# EAGLE board 00A-050-A (EAGLE 6.3)
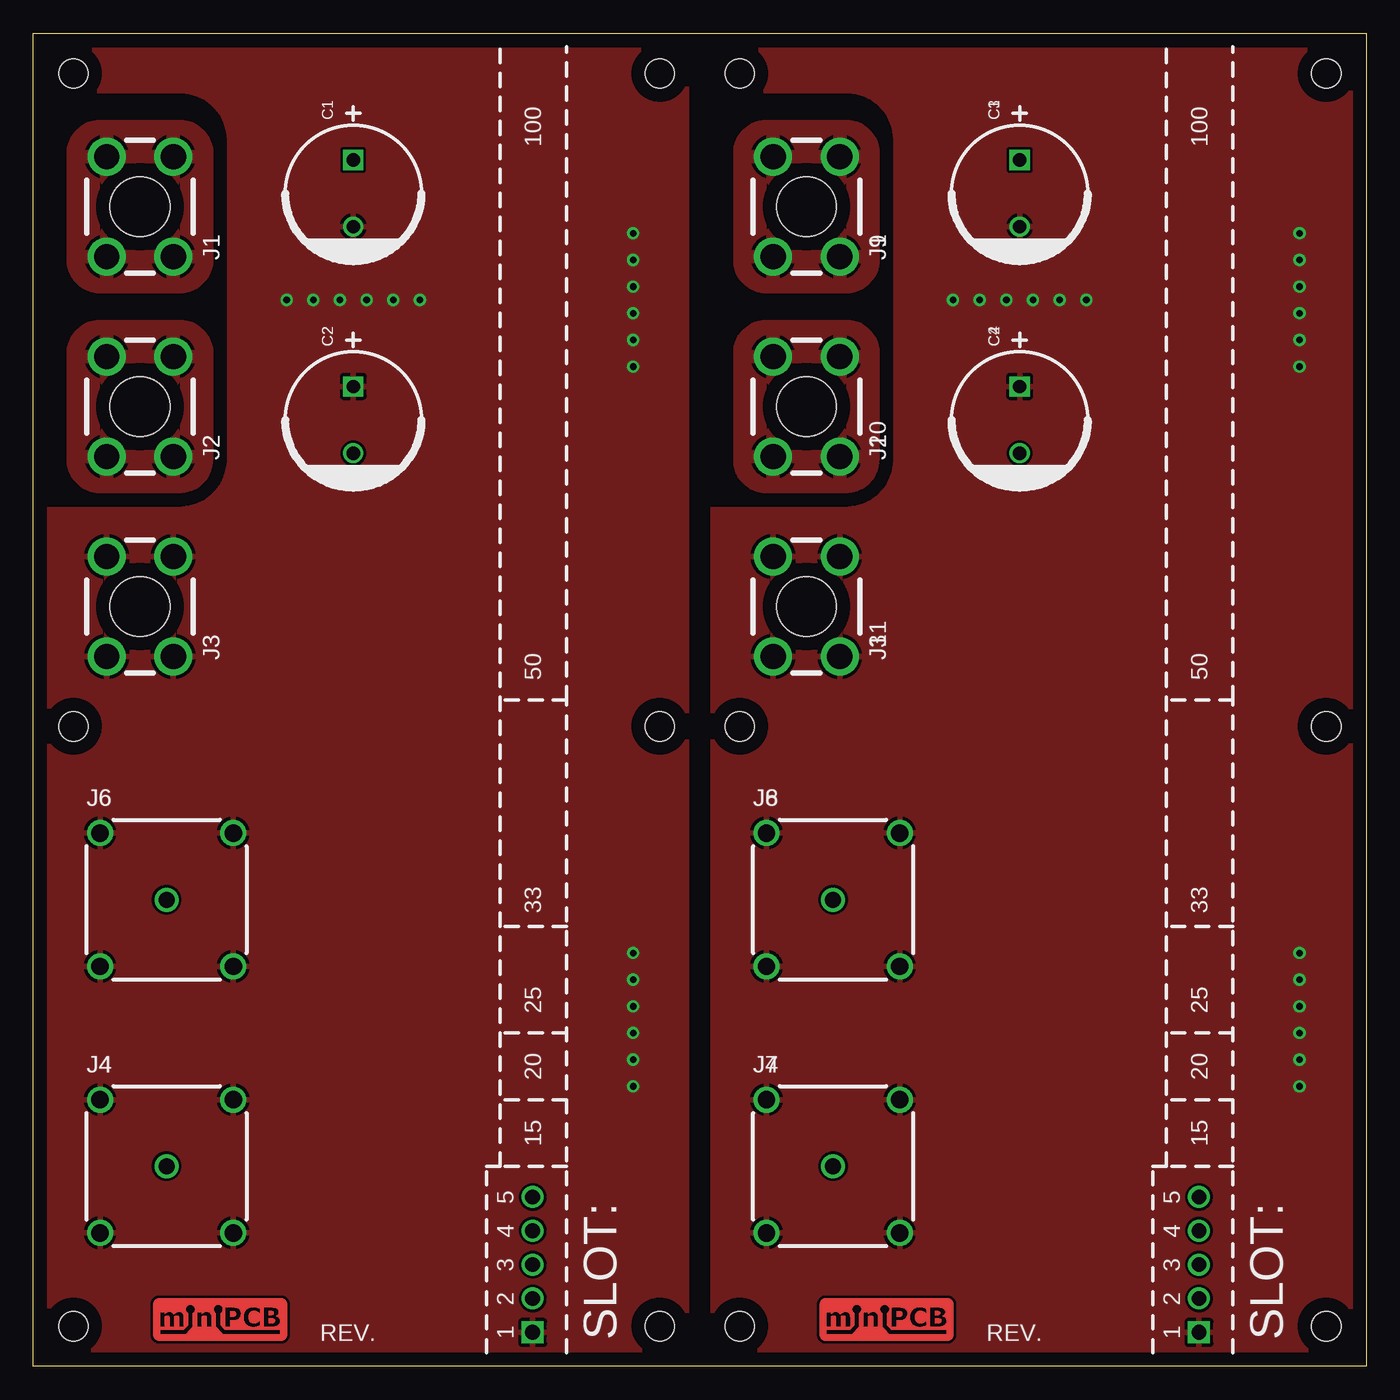
[diagram p0: board, top side]
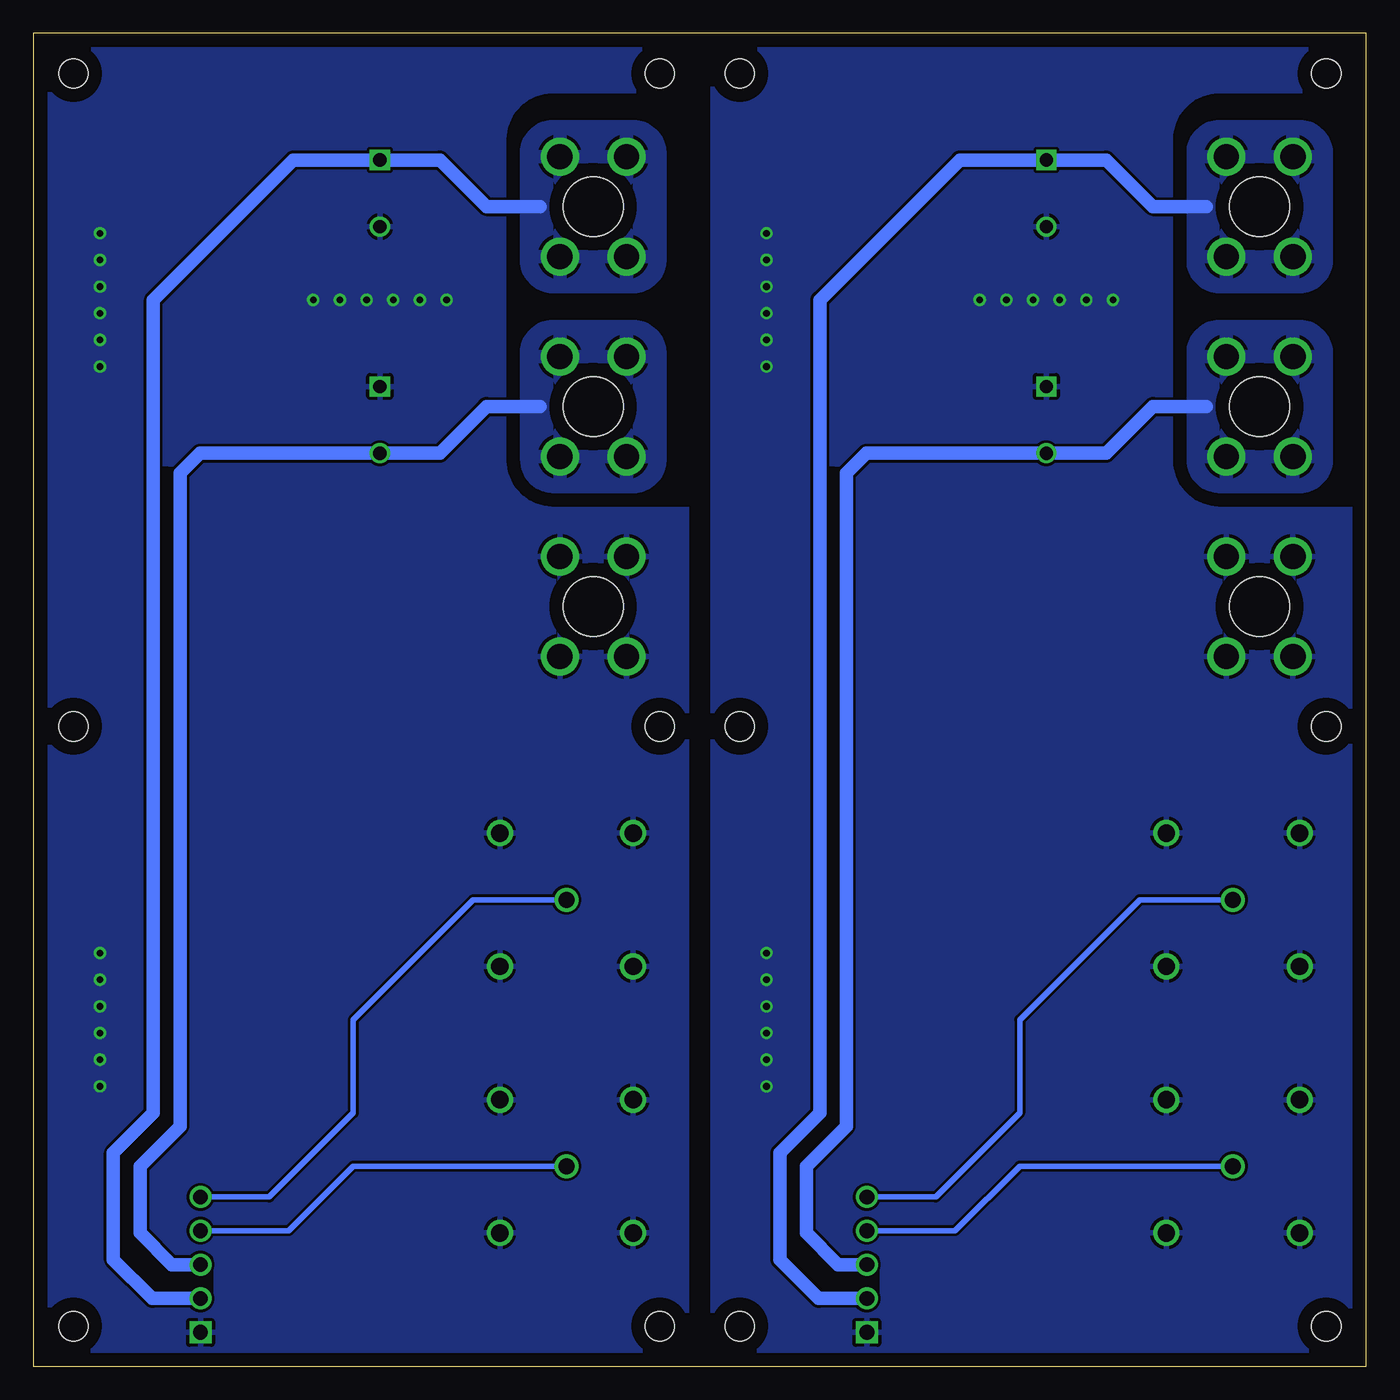
[diagram p1: board, bottom side, seen from below]

Size 100 x 100 mm. Coordinates in mm from the lower left corner, seen from the top.
Outline: 0,0 0,100 100,100 100,0 0,0
Copper layers (1*16): Top 0.035mm / dielectric 1.5mm / Bottom 0.035mm
Design rules "default": minimum track width 10mil, minimum drill 24mil, track to track 8mil, track to pad 8mil, pad to pad 8mil, via to via 8mil, smd to smd 8mil, copper to edge 40mil, drill to drill 8mil, minimum pad ring 10mil, minimum via ring 8mil, stop-mask expansion 4mil, vias tented up to drill 0mil, thermal gap 10mil
Holes 4.5 mm at 8,87 8,72 8,57 58,87 58,72 58,57
tRestrict: 10 lines
bRestrict: 14 lines

## Footprints (pad centres in the part's own frame; a part is rotated, then mirrored left to right if it is on the bottom)
C5MM = drill 1 square: + -2.5,0 | drill 1: - 2.5,0
SCREW-TERMINAL-M3 = drill 1.9: 1 -2.5,3.75; 2 2.5,3.75; 3 -2.5,-3.75; 4 2.5,-3.75
B35N14H = drill 1.2: 1.SIG 0,0 | drill 1.3: 2.GND 5,5; 3.GND 5,-5; 4.GND -5,-5; 5.GND -5,5
MINIPCB_DOCK_5P = drill 1.1 square: 1 2.54,2.54 | drill 1.1: 2 5.08,2.54; 3 7.62,2.54; 4 10.16,2.54; 5 12.7,2.54
MINIPCB_DOCK_50X100 = hole 2.2: 3,97; 3,48; 3,3; 47,3; 47,48; 47,97

## Placement (x,y rotation side)
C1  [C5MM]  24,88 270 top
C2  [C5MM]  24,71 270 top
C3  [C5MM]  74,88 270 top
C4  [C5MM]  74,71 270 top
J1  +V  [SCREW-TERMINAL-M3]  8,87 0 top
J2  -V  [SCREW-TERMINAL-M3]  8,72 0 top
J3  GND  [SCREW-TERMINAL-M3]  8,57 0 top
J4  IN.A  [B35N14H]  10,15 0 top
J5  SLOT: A  [MINIPCB_DOCK_5P]  40,0 90 top
J6  OUT.A  [B35N14H]  10,35 0 top
J7  IN.A  [B35N14H]  60,15 0 top
J8  OUT.A  [B35N14H]  60,35 0 top
J9  +V  [SCREW-TERMINAL-M3]  58,87 0 top
J10  -V  [SCREW-TERMINAL-M3]  58,72 0 top
J11  GND  [SCREW-TERMINAL-M3]  58,57 0 top
J12  SLOT: A  [MINIPCB_DOCK_5P]  90,0 90 top
PCB  [MINIPCB_DOCK_50X100]  0,0 0 top
PCB1  [MINIPCB_DOCK_50X100]  50,0 0 top

## Library data of the parts
C1-C4 J1-J4 J6-J11 = minipcb
J5 J12 = minipcb; SLOT: A
PCB PCB1 = minipcb; PART_NUMBER: 00A-050; REVISION: A

## Nets
GND: C1.- C2.+ J3.1 J3.2 J3.3 J3.4 J4.2.GND J4.3.GND J4.4.GND J4.5.GND J5.1 J6.2.GND J6.3.GND J6.4.GND J6.5.GND
GND1: C3.- C4.+ J7.2.GND J7.3.GND J7.4.GND J7.5.GND J8.2.GND J8.3.GND J8.4.GND J8.5.GND J11.1 J11.2 J11.3 J11.4 J12.1
N$1: J4.1.SIG J5.4
N$2: J5.5 J6.1.SIG
N$3: J7.1.SIG J12.4
N$4: J8.1.SIG J12.5
V+: C1.+ J1.1 J1.2 J1.3 J1.4 J5.2
V+1: C3.+ J9.1 J9.2 J9.3 J9.4 J12.2
V-: C2.- J2.1 J2.2 J2.3 J2.4 J5.3
V-1: C4.- J10.1 J10.2 J10.3 J10.4 J12.3

## Tracks (layer width: path | path; a pad name or v marks a point on that pad's centre or on a via)
GND  (via drill 0.5)
  other vias: 19,80 21,80 23,80 25,80 27,80 29,80 45,75 45,77 45,79 45,81 45,83 45,85 45,21 45,23 45,25 45,27 45,29 45,31
  pour Bottom: 1,1 49,1 49,99 1,99
  pour Top: 1,1 49,1 49,99 1,99
GND1  (via drill 0.5)
  other vias: 69,80 71,80 73,80 75,80 77,80 79,80 95,75 95,77 95,79 95,81 95,83 95,85 95,21 95,23 95,25 95,27 95,29 95,31
  pour Bottom: 51,1 99,1 99,99 51,99
  pour Top: 51,1 99,1 99,99 51,99
N$1
  Bottom 0.406: J4.1.SIG 26,15 30.84,10.16 J5.4
N$2
  Bottom 0.406: J6.1.SIG 17,35 26,26 26,19 32.3,12.7 J5.5
N$3
  Bottom 0.406: J7.1.SIG 76,15 80.84,10.16 J12.4
N$4
  Bottom 0.406: J8.1.SIG 67,35 76,26 76,19 82.3,12.7 J12.5
V+
  Bottom 1.016: J5.2 41.08,5.08 44,8 44,16 41,19 41,80 30.5,90.5 C1.+ 19.5,90.5 16,87 12,87
  pour Bottom: 5,93 11,93 arc-90 13,91 13,83 arc-90 11,81 5,81 arc-90 3,83 3,91 arc-90
  pour Top: 5,93 11,93 arc-90 13,91 13,83 arc-90 11,81 5,81 arc-90 3,83 3,91 arc-90
V+1
  Bottom 1.016: J12.2 91.08,5.08 94,8 94,16 91,19 91,80 80.5,90.5 C3.+ 69.5,90.5 66,87 62,87
  pour Bottom: 55,93 61,93 arc-90 63,91 63,83 arc-90 61,81 55,81 arc-90 53,83 53,91 arc-90
  pour Top: 55,93 61,93 arc-90 63,91 63,83 arc-90 61,81 55,81 arc-90 53,83 53,91 arc-90
V-
  Bottom 1.016: J5.3 39.62,7.62 42,10 42,15 39,18 39,67 37.5,68.5 C2.- 19.5,68.5 16,72 12,72
  pour Bottom: 5,78 11,78 arc-90 13,76 13,68 arc-90 11,66 5,66 arc-90 3,68 3,76 arc-90
  pour Top: 5,78 11,78 arc-90 13,76 13,68 arc-90 11,66 5,66 arc-90 3,68 3,76 arc-90
V-1
  Bottom 1.016: J12.3 89.62,7.62 92,10 92,15 89,18 89,67 87.5,68.5 C4.- 69.5,68.5 66,72 62,72
  pour Bottom: 55,78 61,78 arc-90 63,76 63,68 arc-90 61,66 55,66 arc-90 53,68 53,76 arc-90
  pour Top: 55,78 61,78 arc-90 63,76 63,68 arc-90 61,66 55,66 arc-90 53,68 53,76 arc-90

## Text on the board
_tNames: C1 | C1 | J1 | J1 | C2 | C2 | J2 | J2 | J3 | J3 | J6 | J6 | J4 | J4